# EAGLE board RS232_2xNPN_Mirrored (EAGLE 7.7.0)
RS232 Adapter using two NPN Transistors
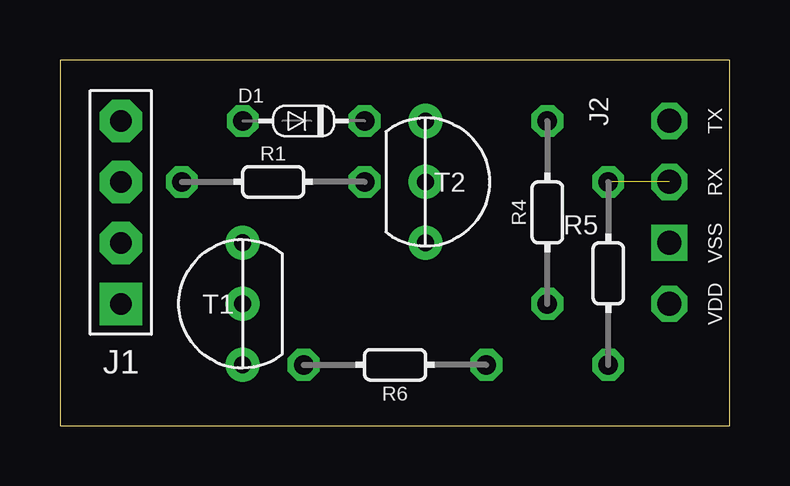
[diagram p0: board, top side]
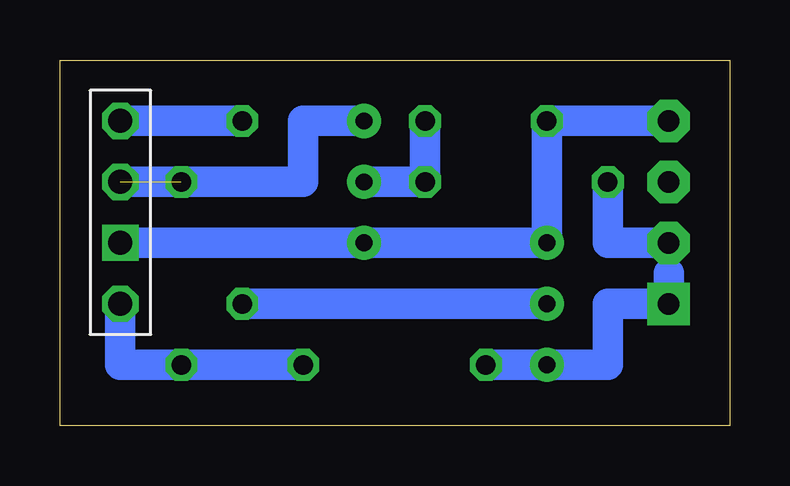
[diagram p1: board, bottom side, seen from below]

Size 27.92 x 15.24 mm. Coordinates in mm from the lower left corner, seen from the top.
Outline: 0,0 27.92,0 27.92,15.24 0,15.24 0,0
Copper layers (1*16): Top 0.035mm / dielectric 1.5mm / Bottom 0.035mm
Design rules "default": minimum track width 10mil, minimum drill 24mil, track to track 8mil, track to pad 8mil, pad to pad 8mil, via to via 8mil, smd to smd 8mil, copper to edge 40mil, drill to drill 8mil, minimum pad ring 10mil, minimum via ring 8mil, stop-mask expansion 4mil, vias tented up to drill 0mil, thermal gap 10mil
Net classes: 0 default: width 0.813 mm

## Footprints (pad centres in the part's own frame; a part is rotated, then mirrored left to right if it is on the bottom)
DO34-5 = drill 0.813 octagon: A 2.54,0; C -2.54,0
RS232-4PIN-NEW = drill 0.9 pad 1.778 square: 1 0,-3.81 | drill 0.9 pad 1.778 octagon: 2 0,-1.27; 3 0,1.27; 4 0,3.81
PIC-UART-X = drill 1 octagon: 17 0,-3.81; 18 0,-1.27; 20 0,3.81 | drill 1 square: 19 0,1.27
0202/7 = drill 0.813 octagon: 1 -3.81,0; 2 3.81,0
0202/7-V = drill 0.813 octagon: 1 0,-3.81; 2 0,3.81
TO92-CBE = drill 0.7 pad 1.422: B 0,0; C 0,2.54; E 0,-2.54

## Placement (x,y rotation side)
D1  1N4148  [DO34-5]  10.16,12.7 180 top
J1  COMPORT-4PIN-NEW  [RS232-4PIN-NEW]  2.54,8.89 0 top
J2  PIC-UART-X  [PIC-UART-X]  25.4,8.89 180 top
R1  4.7kΩ  [0202/7]  8.89,10.16 180 top
R4  10kΩ  [0202/7]  20.32,8.89 270 top
R5  1kΩ  [0202/7-V]  22.86,6.35 180 top
R6  1kΩ  [0202/7]  13.97,2.54 0 top
T1  BC547  [TO92-CBE]  7.62,5.08 180 top
T2  BC547  [TO92-CBE]  15.24,10.16 0 top

## Library data of the parts
D1 = d
J1 J2 = pinconn
R1 R4-R6 = r
T1 T2 = t

## Nets
+5V: J2.20 R5.2 R6.2
GND: D1.A J1.4 J2.19 T1.E T2.E
N$1: J2.18 R5.1 T2.C
N$2: D1.C R1.1 T2.B
N$3: J1.2 R1.2
N$4: J2.17 R4.1
N$5: R4.2 T1.B
N$9: J1.1 R6.1 T1.C

## Tracks (layer width: path | path; a pad name or v marks a point on that pad's centre or on a via)
+5V
  Bottom 1.27: R6.2 R5.2 25.4,2.54 J2.20
GND
  Bottom 1.27: J1.4 D1.A T1.E | T2.E T1.E | T1.E J2.19
N$1  (1 unrouted)
  Bottom 1.27: J2.18 20.32,10.16 17.78,10.16 17.78,12.7 T2.C
N$2
  Bottom 1.27: D1.C R1.1 T2.B
N$3
  Bottom 1.27: J1.2 5.08,7.62 R1.2
N$4
  Bottom 1.27: J2.17 R4.1
N$5
  Bottom 1.27: T1.B R4.2
N$9
  Bottom 1.27: R6.1 T1.C 5.08,2.54 5.08,5.08 J1.1 2.54,6.35